# Altium PCB relay.PcbDoc (part 4 of 4)
Units mil, origin at the board's own origin, x right, y up, seen from the top; angles counter-clockwise.
Board outline 5718.69 x 3947.04 mil, 2 copper layers (Top Layer, Bottom Layer); 122 components, 108 nets, 435 pads, 81 vias.
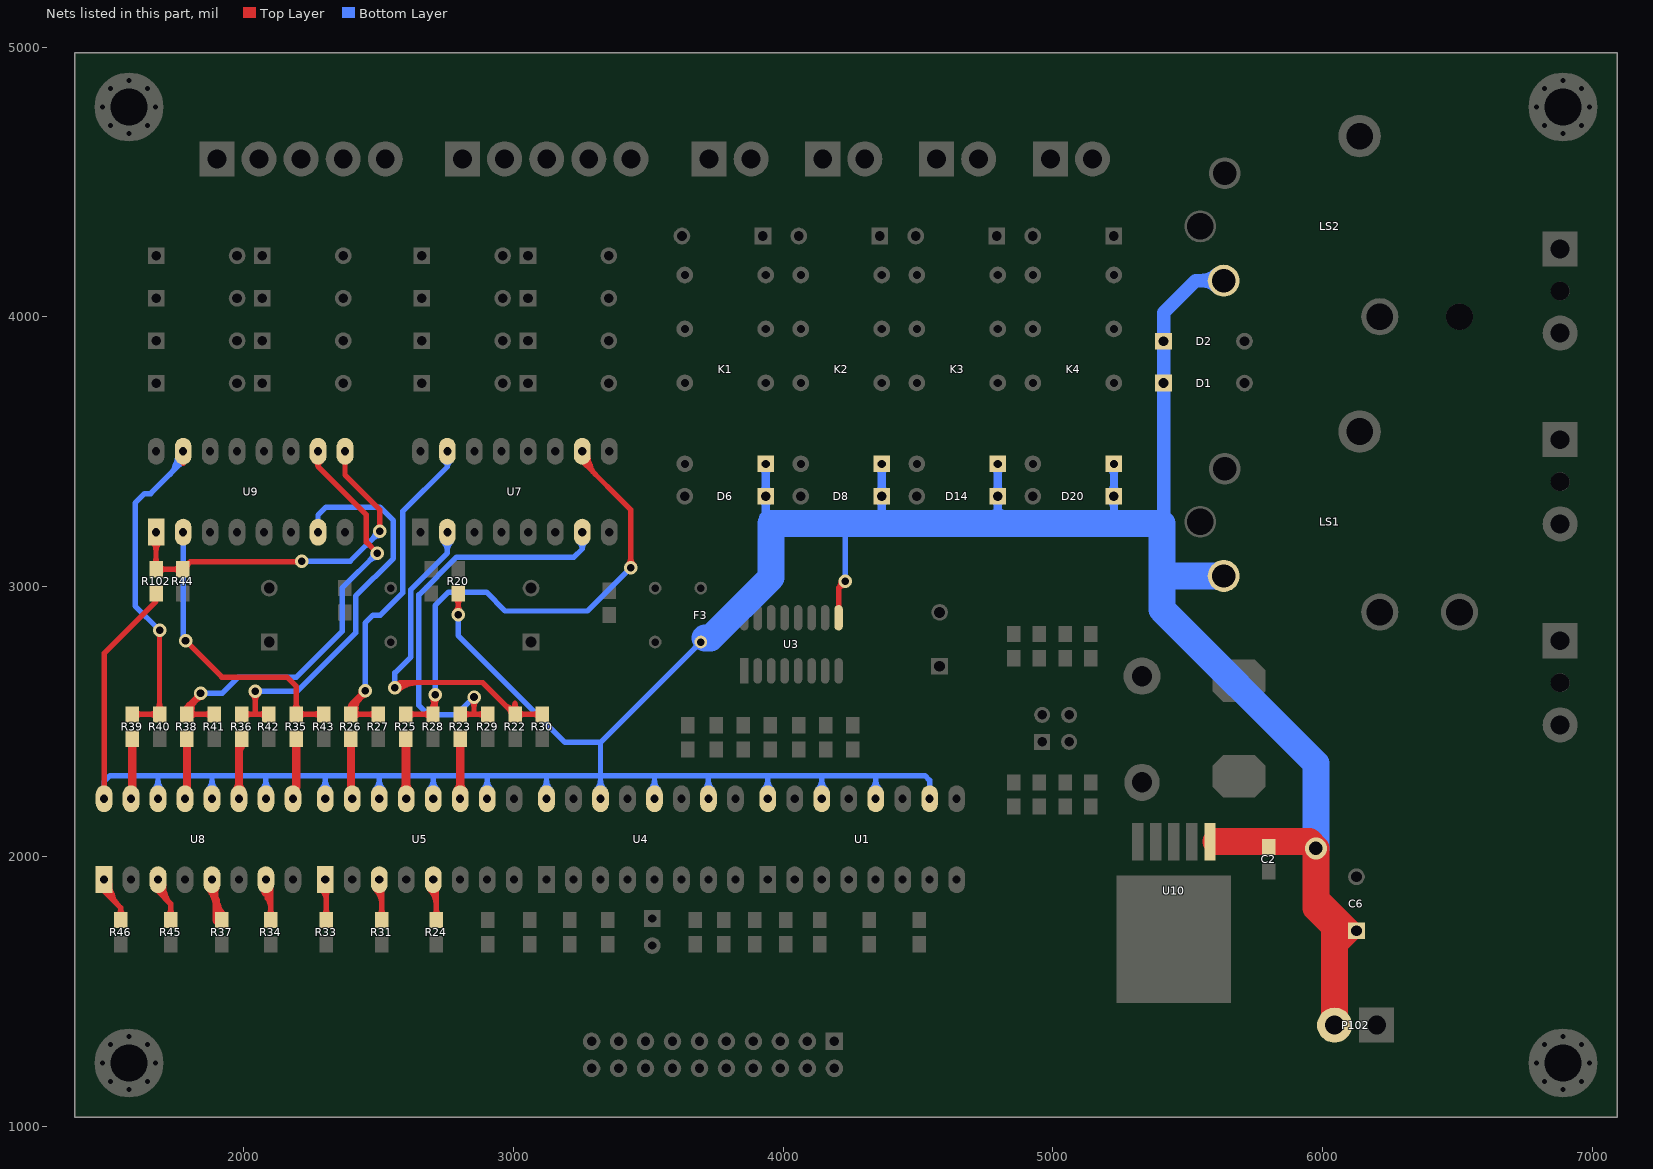
[diagram p4: the nets of this part, all layers, seen from the top]

## Via types
v1: diameter 50, hole 28, Top Layer to Bottom Layer, 42 vias
v2: diameter 50, hole 30, Top Layer to Bottom Layer, 36 vias
v3: diameter 80, hole 50, Top Layer to Bottom Layer, 2 vias
v4: diameter 100, hole 60, Top Layer to Bottom Layer, 1 vias

## Nets (pads, with @x,y where several pads share a name; then routed paths per layer and width w, separated by ;. In a path a pad name is that pad's centre, name@x,y a point inside that pad or via, vN(x,y) a via of type N, cw(c..) or ccw(c..) an arc to the next point about the centre after c; other vN are vias at no path point) (continued)
NetR22_2: R22.2 R30.2 U7.2 | length 2176.5
  Top Layer w20: v1@2557.09,2628.54 cw(c2596.84,2588.79) 2596.84,2645 ; v1(2560.63,2625) 2580.63,2645 ; v1@2563.46,2639.73 ccw(c2567.08,2658.55) 2580.63,2645 ; v1@2571.24,2614.39 cw(c2645.13,2540.5) 2645.13,2645 ; v1@2575.36,2627.83 cw(c2594.18,2631.45) 2580.63,2645 ; 2969.11,2562.31 ccw(c3006.35,2599.55) R22.2@3006.35,2546.89 ; R22.2@2985.56,2545.87 cw(c2971.58,2531.89) R22.2@2991.35,2531.89 ; R30.2@3107.7,2526.89 R22.2@3006.35,2526.89 3004.54,2526.89 2886.43,2645 2580.63,2645 ; 3006.35,2568.1 ccw(c3042.56,2568.1) 3016.96,2542.5 cw(c3042.56,2568.1) 3006.35,2568.1 ; 3006.35,2568.1 cw(c2970.14,2568.1) 2995.74,2542.5 ccw(c2970.14,2568.1) 3006.35,2568.1 ; R22.2@3016.96,2516.28 cw(c3042.56,2490.68) 3042.56,2526.89 ; R22.2@3016.96,2516.28 cw(c3042.56,2490.68) 3042.56,2526.89 ; R22.2@3016.96,2516.28 cw(c3042.56,2490.68) 3042.56,2526.89 ; R22.2@3016.96,2537.5 ccw(c3042.56,2563.1) 3042.56,2526.89 ; R22.2@3016.96,2537.5 ccw(c3042.56,2563.1) 3042.56,2526.89 ; R22.2@3016.96,2537.5 ccw(c3042.56,2563.1) 3042.56,2526.89 ; 3071.49,2526.89 ccw(c3071.49,2563.1) R30.2@3097.1,2537.5 ; 3071.49,2526.89 cw(c3071.49,2490.68) R30.2@3097.1,2516.28 ; 3071.49,2526.89 ccw(c3071.49,2563.1) R30.2@3097.1,2537.5 ; 3071.49,2526.89 cw(c3071.49,2490.68) R30.2@3097.1,2516.28 ; 3071.49,2526.89 ccw(c3071.49,2563.1) R30.2@3097.1,2537.5 ; 3071.49,2526.89 cw(c3071.49,2490.68) R30.2@3097.1,2516.28
  Bottom Layer w20: v1(2560.63,2625) 2560.63,2680.63 2620,2740 2620,2989.53 2755.47,3125 U7.2@2755.47,3202.09 ; U7.2@2740.62,3168.24 cw(c2704.77,3132.39) 2755.47,3132.39 ; U7.2@2740.62,3168.24 cw(c2704.77,3132.39) 2755.47,3132.39 ; U7.2@2740.62,3168.24 cw(c2704.77,3132.39) 2755.47,3132.39 ; 2755.47,3132.39 cw(c2806.17,3132.39) U7.2@2770.32,3168.24 ; 2755.47,3132.39 cw(c2806.17,3132.39) U7.2@2770.32,3168.24 ; 2755.47,3132.39 cw(c2806.17,3132.39) U7.2@2770.32,3168.24
NetR23_1: R23.1 U5.11 | length 891.9
  Top Layer w30: U5.11@2803.07,2214.29 2803.07,2396.32 ; R23.1@2803.07,2436.32 R23.1@2803.64,2436.89 U5.11@2803.64,2214.86 ; U5.11@2791.76,2244.61 ccw(c2764.44,2271.92) 2803.07,2271.92 ; U5.11@2791.76,2244.6 ccw(c2763.06,2273.3) 2803.64,2273.3 ; U5.11@2791.76,2244.61 ccw(c2764.44,2271.92) 2803.07,2271.92 ; U5.11@2791.76,2244.6 ccw(c2763.06,2273.3) 2803.64,2273.3 ; U5.11@2791.76,2244.61 ccw(c2764.44,2271.92) 2803.07,2271.92 ; U5.11@2791.76,2244.6 ccw(c2763.06,2273.3) 2803.64,2273.3 ; 2803.07,2271.92 ccw(c2841.7,2271.92) U5.11@2814.38,2244.61 ; 2803.07,2271.92 ccw(c2841.7,2271.92) U5.11@2814.38,2244.61 ; 2803.07,2271.92 ccw(c2841.7,2271.92) U5.11@2814.38,2244.61 ; 2803.07,2406.36 cw(c2829.17,2406.36) R23.1@2810.71,2424.82 ; 2803.07,2406.36 cw(c2829.17,2406.36) R23.1@2810.71,2424.82 ; 2803.07,2406.36 cw(c2829.17,2406.36) R23.1@2810.71,2424.82 ; 2803.07,2406.36 cw(c2829.17,2406.36) R23.1@2810.71,2424.82 ; 2803.07,2406.36 cw(c2829.17,2406.36) R23.1@2810.71,2424.82 ; 2803.07,2406.36 cw(c2829.17,2406.36) R23.1@2810.71,2424.82 ; 2803.64,2270.54 ccw(c2840.32,2270.54) U5.11@2814.38,2244.61 ; 2803.64,2270.54 ccw(c2840.32,2270.54) U5.11@2814.38,2244.61 ; 2803.64,2270.54 ccw(c2840.32,2270.54) U5.11@2814.38,2244.61
NetR23_2: R23.2 R29.2 U7.7 | length 2267.6
  Top Layer w20: R23.2@2815,2538.24 R23.2@2803.64,2526.89 2854.32,2526.89 ; v1(2854.32,2591.31) 2854.32,2526.89 ; R29.2@2905,2526.89 2854.32,2526.89 ; R23.2@2814.25,2516.28 cw(c2839.86,2490.68) 2839.86,2526.89 ; R23.2@2814.25,2516.28 cw(c2839.86,2490.68) 2839.86,2526.89 ; R23.2@2814.25,2516.28 cw(c2839.86,2490.68) 2839.86,2526.89 ; R23.2@2814.25,2537.5 ccw(c2839.86,2563.1) 2839.86,2526.89 ; R23.2@2814.25,2537.5 ccw(c2839.86,2563.1) 2839.86,2526.89 ; R23.2@2814.25,2537.5 ccw(c2839.86,2563.1) 2839.86,2526.89 ; v1@2843.71,2580.7 cw(c2818.11,2555.1) 2854.32,2555.1 ; v1@2843.71,2580.7 cw(c2818.11,2555.1) 2854.32,2555.1 ; v1@2843.71,2580.7 cw(c2818.11,2555.1) 2854.32,2555.1 ; 2854.32,2555.1 cw(c2890.53,2555.1) v1@2864.93,2580.7 ; 2854.32,2555.1 cw(c2890.53,2555.1) v1@2864.93,2580.7 ; 2854.32,2555.1 cw(c2890.53,2555.1) v1@2864.93,2580.7 ; 2868.78,2526.89 ccw(c2868.78,2563.1) R29.2@2894.39,2537.5 ; 2868.78,2526.89 cw(c2868.78,2490.68) R29.2@2894.39,2516.28 ; 2868.78,2526.89 ccw(c2868.78,2563.1) R29.2@2894.39,2537.5 ; 2868.78,2526.89 cw(c2868.78,2490.68) R29.2@2894.39,2516.28 ; 2868.78,2526.89 ccw(c2868.78,2563.1) R29.2@2894.39,2537.5 ; 2868.78,2526.89 cw(c2868.78,2490.68) R29.2@2894.39,2516.28
  Bottom Layer w20: v1(2854.32,2591.31) 2788.01,2525 2685,2525 2650,2560 2650,2970 2790,3110 3225,3110 3255.47,3140.47 ; U7.7@3255.47,3202.09 3255.47,3140.47 ; U7.7@3242.68,3166.43 cw(c3222.74,3140.47) 3255.47,3140.47 ; U7.7@3242.68,3166.43 cw(c3222.74,3140.47) 3255.47,3140.47 ; U7.7@3242.68,3166.43 cw(c3222.74,3140.47) 3255.47,3140.47 ; 3255.47,3140.47 cw(c3288.21,3140.47) U7.7@3268.27,3166.43 ; 3255.47,3140.47 cw(c3288.21,3140.47) U7.7@3268.27,3166.43 ; 3255.47,3140.47 cw(c3288.21,3140.47) U7.7@3268.27,3166.43
NetR24_1: R24.1 U5.5 | length 662.9
  Top Layer w20: R24.1@2715,1765 2715,1883.07 2703.07,1895 U5.5@2703.07,1914.29 U5.5@2717.91,1899.46 ; U5.5@2688.22,1880.44 cw(c2623.57,1815.79) 2715,1815.79 ; U5.5@2688.22,1880.44 cw(c2623.57,1815.79) 2715,1815.79 ; U5.5@2688.22,1880.44 cw(c2623.57,1815.79) 2715,1815.79 ; U5.5@2702.36,1894.58 cw(c2671.86,1864.08) 2715,1864.08 ; U5.5@2702.36,1894.58 cw(c2671.86,1864.08) 2715,1864.08 ; U5.5@2702.36,1894.58 cw(c2671.86,1864.08) 2715,1864.08 ; R24.1@2704.39,1780.61 ccw(c2678.79,1806.21) 2715,1806.21 ; R24.1@2704.39,1780.61 ccw(c2678.79,1806.21) 2715,1806.21 ; R24.1@2704.39,1780.61 ccw(c2678.79,1806.21) 2715,1806.21 ; 2715,1806.21 ccw(c2751.21,1806.21) R24.1@2725.61,1780.61 ; 2715,1806.21 ccw(c2751.21,1806.21) R24.1@2725.61,1780.61 ; 2715,1806.21 ccw(c2751.21,1806.21) R24.1@2725.61,1780.61
NetR25_1: R25.1 U5.13 | length 913.1
  Top Layer w30: U5.13@2600.94,2216.42 R25.1@2600.94,2436.89 ; U5.13@2603.07,2214.29 2603.07,2394.76 ; U5.13@2591.76,2244.61 ccw(c2564.44,2271.92) 2603.07,2271.92 ; U5.13@2591.76,2244.61 ccw(c2569.59,2266.77) 2600.94,2266.77 ; U5.13@2591.76,2244.61 ccw(c2564.44,2271.92) 2603.07,2271.92 ; U5.13@2591.76,2244.61 ccw(c2569.59,2266.77) 2600.94,2266.77 ; U5.13@2591.76,2244.61 ccw(c2564.44,2271.92) 2603.07,2271.92 ; U5.13@2591.76,2244.61 ccw(c2569.59,2266.77) 2600.94,2266.77 ; R25.1@2593.87,2424.82 cw(c2571.65,2402.6) 2603.07,2402.6 ; R25.1@2593.87,2424.82 cw(c2571.65,2402.6) 2603.07,2402.6 ; R25.1@2593.87,2424.82 cw(c2571.65,2402.6) 2603.07,2402.6 ; R25.1@2593.87,2424.82 cw(c2571.65,2402.6) 2603.07,2402.6 ; R25.1@2593.87,2424.82 cw(c2571.65,2402.6) 2603.07,2402.6 ; R25.1@2593.87,2424.82 cw(c2571.65,2402.6) 2603.07,2402.6 ; 2600.94,2277.07 ccw(c2646.85,2277.07) U5.13@2614.38,2244.61 ; 2600.94,2277.07 ccw(c2646.85,2277.07) U5.13@2614.38,2244.61 ; 2600.94,2277.07 ccw(c2646.85,2277.07) U5.13@2614.38,2244.61 ; 2603.07,2271.92 ccw(c2641.7,2271.92) U5.13@2614.38,2244.61 ; 2603.07,2271.92 ccw(c2641.7,2271.92) U5.13@2614.38,2244.61 ; 2603.07,2271.92 ccw(c2641.7,2271.92) U5.13@2614.38,2244.61
NetR25_2: R25.2 R28.2 U7.10 | length 3474
  Top Layer w20: R25.2@2600.94,2526.89 R28.2@2702.29,2526.89 2710,2534.6 v1(2710,2600) ; U7.10@3255.47,3502.09 3255.47,3465.16 3435.63,3285 v1(3435.63,3070.63) ; R25.2@2611.54,2516.28 cw(c2637.15,2490.68) 2637.15,2526.89 ; R25.2@2611.54,2516.28 cw(c2637.15,2490.68) 2637.15,2526.89 ; R25.2@2611.54,2516.28 cw(c2637.15,2490.68) 2637.15,2526.89 ; R25.2@2611.54,2537.5 ccw(c2637.15,2563.1) 2637.15,2526.89 ; R25.2@2611.54,2537.5 ccw(c2637.15,2563.1) 2637.15,2526.89 ; R25.2@2611.54,2537.5 ccw(c2637.15,2563.1) 2637.15,2526.89 ; 2666.08,2526.89 ccw(c2666.08,2563.1) R28.2@2691.68,2537.5 ; 2666.08,2526.89 cw(c2666.08,2490.68) R28.2@2691.68,2516.28 ; 2666.08,2526.89 ccw(c2666.08,2563.1) R28.2@2691.68,2537.5 ; 2666.08,2526.89 cw(c2666.08,2490.68) R28.2@2691.68,2516.28 ; 2666.08,2526.89 ccw(c2666.08,2563.1) R28.2@2691.68,2537.5 ; 2666.08,2526.89 cw(c2666.08,2490.68) R28.2@2691.68,2516.28 ; R28.2@2691.68,2542.5 ccw(c2647.47,2586.71) v1@2710,2586.71 ; R28.2@2691.68,2542.5 ccw(c2647.47,2586.71) v1@2710,2586.71 ; R28.2@2691.68,2542.5 ccw(c2647.47,2586.71) v1@2710,2586.71 ; v1@2697.76,2591.33 cw(c2668.41,2570.52) 2703.16,2561.2 ; v1@2697.76,2591.33 cw(c2668.41,2570.52) 2703.16,2561.2 ; v1@2697.76,2591.33 cw(c2668.41,2570.52) 2703.16,2561.2 ; v1@2697.76,2591.33 cw(c2668.41,2570.52) 2703.16,2561.2 ; v1@2697.76,2591.33 cw(c2668.41,2570.52) 2703.16,2561.2 ; v1@2697.76,2591.33 cw(c2668.41,2570.52) 2703.16,2561.2 ; v1@2699.39,2589.39 cw(c2673.79,2563.79) 2710,2563.79 ; v1@2699.39,2589.39 cw(c2673.79,2563.79) 2710,2563.79 ; v1@2699.39,2589.39 cw(c2673.79,2563.79) 2710,2563.79 ; 2706.1,2572.15 cw(c2729.74,2565.81) v1@2717.5,2587.01 ; 2706.1,2572.15 cw(c2729.74,2565.81) v1@2717.5,2587.01 ; 2706.1,2572.15 cw(c2729.74,2565.81) v1@2717.5,2587.01 ; 2706.1,2572.15 cw(c2729.74,2565.81) v1@2717.5,2587.01 ; 2706.1,2572.15 cw(c2729.74,2565.81) v1@2717.5,2587.01 ; 2706.1,2572.15 cw(c2729.74,2565.81) v1@2717.5,2587.01 ; 2710,2563.79 cw(c2746.21,2563.79) v1@2720.61,2589.39 ; 2710,2563.79 cw(c2746.21,2563.79) v1@2720.61,2589.39 ; 2710,2563.79 cw(c2746.21,2563.79) v1@2720.61,2589.39 ; U7.10@3255.04,3482.18 cw(c3229.65,3428.55) 3286.97,3443.91 ; U7.10@3255.04,3482.18 cw(c3229.65,3428.55) 3286.97,3443.91 ; U7.10@3255.04,3482.18 cw(c3229.65,3428.55) 3286.97,3443.91 ; U7.10@3256.47,3483.09 ccw(c3302.17,3483.09) 3269.86,3450.77 ; U7.10@3256.47,3483.09 ccw(c3302.17,3483.09) 3269.86,3450.77 ; U7.10@3256.47,3483.09 ccw(c3302.17,3483.09) 3269.86,3450.77 ; U7.10@3276.47,3483.09 ccw(c3370.46,3483.09) 3304,3416.63 ; U7.10@3276.47,3483.09 ccw(c3370.46,3483.09) 3304,3416.63 ; U7.10@3276.47,3483.09 ccw(c3370.46,3483.09) 3304,3416.63 ; v1@3425.02,3081.24 ccw(c3399.42,3106.84) 3435.63,3106.84 ; v1@3425.02,3081.24 ccw(c3399.42,3106.84) 3435.63,3106.84 ; v1@3425.02,3081.24 ccw(c3399.42,3106.84) 3435.63,3106.84 ; 3435.63,3106.84 ccw(c3471.84,3106.84) v1@3446.24,3081.24 ; 3435.63,3106.84 ccw(c3471.84,3106.84) v1@3446.24,3081.24 ; 3435.63,3106.84 ccw(c3471.84,3106.84) v1@3446.24,3081.24
  Bottom Layer w20: v1(2710,2600) 2710,2930 2760,2980 2900,2980 2970,2910 3275,2910 v1(3435.63,3070.63)
NetR26_1: R26.1 U5.15 | length 395.5
  Top Layer w20: U5.15@2403.07,2214.29 2403.07,2392.05
  Top Layer w30: U5.15@2398.23,2219.13 R26.1@2398.23,2436.89
NetR26_2: R26.2 R27.2 U7.15 | length 2987.1
  Top Layer w20: v1(2450.63,2615) 2400.63,2565 ; R27.2@2499.58,2526.89 R26.2@2400.63,2526.89 ; R26.2@2389.01,2543.72 ccw(c2374.29,2562.6) 2398.23,2562.6 ; R26.2@2389.01,2543.72 ccw(c2374.29,2562.6) 2398.23,2562.6 ; R26.2@2389.01,2543.72 ccw(c2374.29,2562.6) 2398.23,2562.6 ; R26.2@2389.72,2544.24 ccw(c2375.43,2565) 2400.63,2565 ; R26.2@2389.72,2544.24 ccw(c2375.43,2565) 2400.63,2565 ; R26.2@2389.72,2544.24 ccw(c2375.43,2565) 2400.63,2565 ; R26.2@2393.23,2531.89 cw(c2455.31,2531.89) 2411.41,2575.78 ; R26.2@2393.23,2531.89 cw(c2455.31,2531.89) 2411.41,2575.78 ; R26.2@2393.23,2531.89 cw(c2455.31,2531.89) 2411.41,2575.78 ; R26.2@2398.23,2526.89 R26.2@2400.63,2526.89 ; R26.2@2398.23,2526.89 2398.23,2562.6 ; R26.2@2398.23,2526.89 R26.2@2400.63,2529.29 ; 2398.23,2562.6 ccw(c2422.17,2562.6) R26.2@2407.45,2543.72 ; 2398.23,2562.6 ccw(c2422.17,2562.6) R26.2@2407.45,2543.72 ; 2398.23,2562.6 ccw(c2422.17,2562.6) R26.2@2407.45,2543.72 ; 2398.23,2562.6 2400.63,2565 ; R26.2@2400.63,2526.89 R26.2@2400.63,2529.29 ; R26.2@2400.63,2529.29 2400.63,2565 ; 2400.63,2562.31 ccw(c2428.66,2562.31) R26.2@2408.84,2542.5 ; 2400.63,2562.31 ccw(c2428.66,2562.31) R26.2@2408.84,2542.5 ; 2400.63,2562.31 ccw(c2428.66,2562.31) R26.2@2408.84,2542.5 ; R26.2@2400.73,2527.56 ccw(c2382.03,2559.95) R26.2@2418.16,2550.27 ; R26.2@2400.73,2527.56 ccw(c2382.03,2559.95) R26.2@2418.16,2550.27 ; R26.2@2400.73,2527.56 ccw(c2382.03,2559.95) R26.2@2418.16,2550.27 ; R26.2@2408.84,2516.28 cw(c2434.45,2490.68) 2434.45,2526.89 ; R26.2@2408.84,2516.28 cw(c2434.45,2490.68) 2434.45,2526.89 ; R26.2@2408.84,2516.28 cw(c2434.45,2490.68) 2434.45,2526.89 ; R26.2@2408.84,2537.5 ccw(c2434.45,2563.1) 2434.45,2526.89 ; R26.2@2408.84,2537.5 ccw(c2434.45,2563.1) 2434.45,2526.89 ; R26.2@2408.84,2537.5 ccw(c2434.45,2563.1) 2434.45,2526.89 ; R26.2@2413.23,2531.89 cw(c2523.59,2531.89) v1@2445.56,2609.93 ; R26.2@2413.23,2531.89 cw(c2523.59,2531.89) v1@2445.56,2609.93 ; R26.2@2413.23,2531.89 cw(c2523.59,2531.89) v1@2445.56,2609.93 ; 2428.19,2585.32 ccw(c2418.36,2602.34) v1@2436.67,2609.52 ; 2428.19,2585.32 ccw(c2418.36,2602.34) v1@2436.67,2609.52 ; 2428.19,2585.32 ccw(c2418.36,2602.34) v1@2436.67,2609.52 ; 2428.19,2585.32 ccw(c2418.36,2602.34) v1@2436.67,2609.52 ; 2428.67,2580.68 cw(c2465.53,2559.41) v1@2454.51,2600.51 ; 2428.67,2580.68 cw(c2465.53,2559.41) v1@2454.51,2600.51 ; 2428.67,2580.68 cw(c2465.53,2559.41) v1@2454.51,2600.51 ; 2428.67,2580.68 cw(c2465.53,2559.41) v1@2454.51,2600.51 ; 2428.67,2580.68 cw(c2465.53,2559.41) v1@2454.51,2600.51 ; 2428.67,2580.68 cw(c2465.53,2559.41) v1@2454.51,2600.51 ; 2433.16,2588.45 ccw(c2407.29,2603.39) v1@2436.14,2611.12 ; 2433.16,2588.45 ccw(c2407.29,2603.39) v1@2436.14,2611.12 ; 2433.16,2588.45 ccw(c2407.29,2603.39) v1@2436.14,2611.12 ; 2433.16,2588.45 ccw(c2407.29,2603.39) v1@2436.14,2611.12 ; 2433.16,2588.45 ccw(c2407.29,2603.39) v1@2436.14,2611.12 ; 2433.16,2588.45 ccw(c2407.29,2603.39) v1@2436.14,2611.12 ; 2463.37,2526.89 ccw(c2463.37,2563.1) R27.2@2488.98,2537.5 ; 2463.37,2526.89 cw(c2463.37,2490.68) R27.2@2488.98,2516.28 ; 2463.37,2526.89 ccw(c2463.37,2563.1) R27.2@2488.98,2537.5 ; 2463.37,2526.89 cw(c2463.37,2490.68) R27.2@2488.98,2516.28 ; 2463.37,2526.89 ccw(c2463.37,2563.1) R27.2@2488.98,2537.5 ; 2463.37,2526.89 cw(c2463.37,2490.68) R27.2@2488.98,2516.28
  Bottom Layer w20: v1(2450.63,2615) 2450.63,2865.63 2480,2895 2507.32,2895 2590,2977.68 2590,3279.37 2755.47,3444.84 ; U7.15@2755.47,3502.09 2755.47,3444.84 ; U7.15@2744.2,3465.37 cw(c2731.15,3444.84) 2755.47,3444.84 ; U7.15@2744.2,3465.37 cw(c2731.15,3444.84) 2755.47,3444.84 ; U7.15@2744.2,3465.37 cw(c2731.15,3444.84) 2755.47,3444.84 ; 2755.47,3444.84 cw(c2779.79,3444.84) U7.15@2766.74,3465.37 ; 2755.47,3444.84 cw(c2779.79,3444.84) U7.15@2766.74,3465.37 ; 2755.47,3444.84 cw(c2779.79,3444.84) U7.15@2766.74,3465.37
NetR31_1: R31.1 U5.3 | length 516.5
  Top Layer w20: U5.3@2503.07,1914.29 2512.1,1905.26 R31.1@2512.1,1764.29 ; U5.3@2488.22,1880.44 cw(c2430.58,1822.8) 2512.1,1822.8 ; U5.3@2488.22,1880.44 cw(c2430.58,1822.8) 2512.1,1822.8 ; U5.3@2488.22,1880.44 cw(c2430.58,1822.8) 2512.1,1822.8 ; R31.1@2501.49,1779.9 ccw(c2475.89,1805.5) 2512.1,1805.5 ; R31.1@2501.49,1779.9 ccw(c2475.89,1805.5) 2512.1,1805.5 ; R31.1@2501.49,1779.9 ccw(c2475.89,1805.5) 2512.1,1805.5 ; 2512.1,1805.5 ccw(c2548.31,1805.5) R31.1@2522.71,1779.9 ; 2512.1,1805.5 ccw(c2548.31,1805.5) R31.1@2522.71,1779.9 ; 2512.1,1805.5 ccw(c2548.31,1805.5) R31.1@2522.71,1779.9
NetR33_1: R33.1 U5.1 | length 560.9
  Top Layer w20: U5.1@2303.07,1914.29 2306.29,1911.07 R33.1@2306.29,1764.29 ; U5.1@2288.22,1880.44 cw(c2244.59,1836.81) 2306.29,1836.81 ; U5.1@2288.22,1880.44 cw(c2244.59,1836.81) 2306.29,1836.81 ; U5.1@2288.22,1880.44 cw(c2244.59,1836.81) 2306.29,1836.81 ; R33.1@2295.69,1779.9 ccw(c2270.08,1805.5) 2306.29,1805.5 ; R33.1@2295.69,1779.9 ccw(c2270.08,1805.5) 2306.29,1805.5 ; R33.1@2295.69,1779.9 ccw(c2270.08,1805.5) 2306.29,1805.5 ; 2306.29,1805.5 ccw(c2342.51,1805.5) R33.1@2316.9,1779.9 ; 2306.29,1805.5 ccw(c2342.51,1805.5) R33.1@2316.9,1779.9 ; 2306.29,1805.5 ccw(c2342.51,1805.5) R33.1@2316.9,1779.9 ; 2306.29,1852.37 cw(c2345.99,1852.37) U5.1@2317.92,1880.44 ; 2306.29,1852.37 cw(c2345.99,1852.37) U5.1@2317.92,1880.44 ; 2306.29,1852.37 cw(c2345.99,1852.37) U5.1@2317.92,1880.44
NetR34_1: R34.1 U8.7 | length 1059.6
  Top Layer w20: U8.7@2083.07,1914.29 2100.49,1896.87 R34.1@2100.49,1764.29 ; U8.7@2068.22,1880.44 cw(c1990.32,1802.54) 2100.49,1802.54 ; U8.7@2068.22,1880.44 cw(c1990.32,1802.54) 2100.49,1802.54 ; U8.7@2068.22,1880.44 cw(c1990.32,1802.54) 2100.49,1802.54 ; 2078.59,1862.49 cw(c2100.86,1875.35) U8.7@2083.74,1894.55 ; 2078.59,1862.49 cw(c2100.86,1875.35) U8.7@2083.74,1894.55 ; 2078.59,1862.49 cw(c2100.86,1875.35) U8.7@2083.74,1894.55 ; U8.7@2082.36,1894.58 cw(c2038.61,1850.83) 2100.49,1850.83 ; U8.7@2082.36,1894.58 cw(c2038.61,1850.83) 2100.49,1850.83 ; U8.7@2082.36,1894.58 cw(c2038.61,1850.83) 2100.49,1850.83 ; U8.7@2084.73,1874.36 cw(c2085.85,1860.26) 2098.1,1867.33 ; U8.7@2084.73,1874.36 cw(c2085.85,1860.26) 2098.1,1867.33 ; U8.7@2084.73,1874.36 cw(c2085.85,1860.26) 2098.1,1867.33 ; R34.1@2089.88,1779.9 ccw(c2064.27,1805.5) 2100.49,1805.5 ; R34.1@2089.88,1779.9 ccw(c2064.27,1805.5) 2100.49,1805.5 ; R34.1@2089.88,1779.9 ccw(c2064.27,1805.5) 2100.49,1805.5 ; 2090.88,1841.2 cw(c2117.58,1856.62) U8.7@2097.05,1879.62 ; 2090.88,1841.2 cw(c2117.58,1856.62) U8.7@2097.05,1879.62 ; 2090.88,1841.2 cw(c2117.58,1856.62) U8.7@2097.05,1879.62 ; 2098.1,1867.33 cw(c2109.27,1873.78) U8.7@2099.3,1881.97 ; 2098.1,1867.33 cw(c2109.27,1873.78) U8.7@2099.3,1881.97 ; 2098.1,1867.33 cw(c2109.27,1873.78) U8.7@2099.3,1881.97 ; 2100.49,1805.5 ccw(c2136.7,1805.5) R34.1@2111.09,1779.9 ; 2100.49,1805.5 ccw(c2136.7,1805.5) R34.1@2111.09,1779.9 ; 2100.49,1805.5 ccw(c2136.7,1805.5) R34.1@2111.09,1779.9
NetR35_1: R35.1 U8.9 | length 182.9
  Top Layer w30: R35.1@2193.07,2434.43 R35.1@2195.53,2436.89 U8.9@2195.53,2257.46
NetR35_2: R35.2 R43.2 U9.2 | length 1603.2
  Top Layer w20: v1(1785,2800) 1920,2665 2160.63,2665 2195.53,2630.1 R35.2@2195.53,2526.89 R43.2@2296.88,2526.89 ; R35.2@2184.92,2542.5 ccw(c2159.31,2568.1) 2195.53,2568.1 ; R35.2@2184.92,2542.5 ccw(c2159.31,2568.1) 2195.53,2568.1 ; R35.2@2184.92,2542.5 ccw(c2159.31,2568.1) 2195.53,2568.1 ; 2195.53,2568.1 ccw(c2231.74,2568.1) R35.2@2206.13,2542.5 ; 2195.53,2568.1 ccw(c2231.74,2568.1) R35.2@2206.13,2542.5 ; 2195.53,2568.1 ccw(c2231.74,2568.1) R35.2@2206.13,2542.5 ; R35.2@2206.13,2516.28 cw(c2231.74,2490.68) 2231.74,2526.89 ; R35.2@2206.13,2516.28 cw(c2231.74,2490.68) 2231.74,2526.89 ; R35.2@2206.13,2516.28 cw(c2231.74,2490.68) 2231.74,2526.89 ; R35.2@2206.13,2537.5 ccw(c2231.74,2563.1) 2231.74,2526.89 ; R35.2@2206.13,2537.5 ccw(c2231.74,2563.1) 2231.74,2526.89 ; R35.2@2206.13,2537.5 ccw(c2231.74,2563.1) 2231.74,2526.89 ; 2260.67,2526.89 ccw(c2260.67,2563.1) R43.2@2286.27,2537.5 ; 2260.67,2526.89 cw(c2260.67,2490.68) R43.2@2286.27,2516.28 ; 2260.67,2526.89 ccw(c2260.67,2563.1) R43.2@2286.27,2537.5 ; 2260.67,2526.89 cw(c2260.67,2490.68) R43.2@2286.27,2516.28 ; 2260.67,2526.89 ccw(c2260.67,2563.1) R43.2@2286.27,2537.5 ; 2260.67,2526.89 cw(c2260.67,2490.68) R43.2@2286.27,2516.28
  Bottom Layer w20: U9.2@1776.18,3202.09 1776.18,2808.82 v1(1785,2800)
NetR36_1: R36.1 U8.11 | length 612.5
  Top Layer w30: U8.11@1983.07,2214.29 1983.07,2427.14 R36.1@1992.82,2436.89 ; U8.11@1971.76,2244.61 ccw(c1944.44,2271.92) 1983.07,2271.92 ; U8.11@1971.76,2244.61 ccw(c1944.44,2271.92) 1983.07,2271.92 ; U8.11@1971.76,2244.61 ccw(c1944.44,2271.92) 1983.07,2271.92 ; 1983.07,2271.92 ccw(c2021.7,2271.92) U8.11@1994.38,2244.61 ; 1983.07,2271.92 ccw(c2021.7,2271.92) U8.11@1994.38,2244.61 ; 1983.07,2271.92 ccw(c2021.7,2271.92) U8.11@1994.38,2244.61 ; 1983.07,2384.21 cw(c2040.5,2384.21) R36.1@1999.89,2424.82 ; 1983.07,2384.21 cw(c2040.5,2384.21) R36.1@1999.89,2424.82 ; 1983.07,2384.21 cw(c2040.5,2384.21) R36.1@1999.89,2424.82 ; R36.1@1985.47,2425.11 cw(c1972.22,2412.91) 1987.82,2403.9 ; R36.1@1985.47,2425.11 cw(c1972.22,2412.91) 1987.82,2403.9 ; R36.1@1985.47,2425.11 cw(c1972.22,2412.91) 1987.82,2403.9
NetR36_2: R36.2 R42.2 U9.7 | length 2013.3
  Top Layer w20: R36.2@1990.63,2529.08 R36.2@1992.82,2526.89 2043.5,2526.89 ; v1(2043.5,2612.13) 2043.5,2526.89 ; R42.2@2094.17,2526.89 2043.5,2526.89 ; R36.2@2003.43,2516.28 cw(c2029.03,2490.68) 2029.03,2526.89 ; R36.2@2003.43,2516.28 cw(c2029.03,2490.68) 2029.03,2526.89 ; R36.2@2003.43,2516.28 cw(c2029.03,2490.68) 2029.03,2526.89 ; R36.2@2003.43,2537.5 ccw(c2029.03,2563.1) 2029.03,2526.89 ; R36.2@2003.43,2537.5 ccw(c2029.03,2563.1) 2029.03,2526.89 ; R36.2@2003.43,2537.5 ccw(c2029.03,2563.1) 2029.03,2526.89 ; v1@2032.89,2601.53 cw(c2007.28,2575.92) 2043.5,2575.92 ; v1@2032.89,2601.53 cw(c2007.28,2575.92) 2043.5,2575.92 ; v1@2032.89,2601.53 cw(c2007.28,2575.92) 2043.5,2575.92 ; 2043.5,2575.92 cw(c2079.71,2575.92) v1@2054.1,2601.53 ; 2043.5,2575.92 cw(c2079.71,2575.92) v1@2054.1,2601.53 ; 2043.5,2575.92 cw(c2079.71,2575.92) v1@2054.1,2601.53 ; 2057.96,2526.89 ccw(c2057.96,2563.1) R42.2@2083.57,2537.5 ; 2057.96,2526.89 cw(c2057.96,2490.68) R42.2@2083.57,2516.28 ; 2057.96,2526.89 ccw(c2057.96,2563.1) R42.2@2083.57,2537.5 ; 2057.96,2526.89 cw(c2057.96,2490.68) R42.2@2083.57,2516.28 ; 2057.96,2526.89 ccw(c2057.96,2563.1) R42.2@2083.57,2537.5 ; 2057.96,2526.89 cw(c2057.96,2490.68) R42.2@2083.57,2516.28
  Bottom Layer w20: v1(2043.5,2612.13) 2198.5,2612.13 2415.63,2829.27 2415.63,2965 2555.63,3105 2555.63,3245 2505.63,3295 2305.63,3295 2276.18,3265.55 U9.7@2276.18,3202.09
NetR37_1: R37.1 U8.5 | length 1777.5
  Top Layer w20: U8.5@1883.07,1914.29 1894.68,1902.68 1894.68,1764.29 ; U8.5@1868.22,1880.44 cw(c1804.34,1816.56) 1894.68,1816.56 ; U8.5@1868.22,1880.44 cw(c1804.34,1816.56) 1894.68,1816.56 ; U8.5@1868.22,1880.44 cw(c1804.34,1816.56) 1894.68,1816.56 ; U8.5@1872.54,1877.12 cw(c1840.19,1821.34) 1902.51,1837.92 ; U8.5@1872.54,1877.12 cw(c1840.19,1821.34) 1902.51,1837.92 ; U8.5@1872.54,1877.12 cw(c1840.19,1821.34) 1902.51,1837.92 ; U8.5@1872.54,1877.12 cw(c1840.19,1821.34) 1902.51,1837.92 ; U8.5@1872.54,1877.12 cw(c1840.19,1821.34) 1902.51,1837.92 ; U8.5@1872.54,1877.12 cw(c1840.19,1821.34) 1902.51,1837.92 ; U8.5@1882.36,1894.58 cw(c1852.62,1864.84) 1894.68,1864.84 ; U8.5@1882.36,1894.58 cw(c1852.62,1864.84) 1894.68,1864.84 ; U8.5@1882.36,1894.58 cw(c1852.62,1864.84) 1894.68,1864.84 ; 1894.68,1770.77 ccw(c1920.77,1770.77) R37.1@1902.32,1752.32 ; 1894.68,1770.77 ccw(c1920.77,1770.77) R37.1@1902.32,1752.32 ; 1894.68,1770.77 ccw(c1920.77,1770.77) R37.1@1902.32,1752.32 ; 1894.68,1819.05 ccw(c1969.05,1819.05) R37.1@1916.46,1766.46 ; 1894.68,1819.05 ccw(c1969.05,1819.05) R37.1@1916.46,1766.46 ; 1894.68,1819.05 ccw(c1969.05,1819.05) R37.1@1916.46,1766.46 ; U8.5@1894.68,1867.34 ccw(c2017.34,1867.34) R37.1@1930.61,1780.61 ; U8.5@1894.68,1867.34 ccw(c2017.34,1867.34) R37.1@1930.61,1780.61 ; U8.5@1894.68,1867.34 ccw(c2017.34,1867.34) R37.1@1930.61,1780.61 ; 1895.82,1802.22 ccw(c1926.34,1819.83) R37.1@1921.89,1784.88 ; 1895.82,1802.22 ccw(c1926.34,1819.83) R37.1@1921.89,1784.88 ; 1895.82,1802.22 ccw(c1926.34,1819.83) R37.1@1921.89,1784.88 ; 1897.5,1856.75 cw(c1933.17,1866.24) U8.5@1901.24,1884.76 ; 1897.5,1856.75 cw(c1933.17,1866.24) U8.5@1901.24,1884.76 ; 1897.5,1856.75 cw(c1933.17,1866.24) U8.5@1901.24,1884.76 ; 1897.5,1856.75 cw(c1933.17,1866.24) U8.5@1901.24,1884.76 ; 1897.5,1856.75 cw(c1933.17,1866.24) U8.5@1901.24,1884.76 ; 1897.5,1856.75 cw(c1933.17,1866.24) U8.5@1901.24,1884.76 ; 1903.05,1828.34 cw(c1852.14,1798.96) R37.1@1906.2,1775.89 ; 1903.05,1828.34 cw(c1852.14,1798.96) R37.1@1906.2,1775.89 ; 1903.05,1828.34 cw(c1852.14,1798.96) R37.1@1906.2,1775.89 ; R37.1@1903.54,1788.85 cw(c1886.46,1778.99) R37.1@1905.51,1773.88 ; R37.1@1903.54,1788.85 cw(c1886.46,1778.99) R37.1@1905.51,1773.88 ; R37.1@1903.54,1788.85 cw(c1886.46,1778.99) R37.1@1905.51,1773.88
NetR38_1: R38.1 U8.13 | length 215.6
  Top Layer w30: U8.13@1790.11,2221.34 R38.1@1790.11,2436.89
NetR38_2: R38.2 R41.2 U9.10 | length 3179.7
  Top Layer w20: v1(1840.63,2605) R38.2@1790.63,2555 ; R41.2@1891.47,2526.89 R38.2@1790.63,2526.89 ; U9.10@2276.18,3502.09 2276.18,3445.63 ; v1(2495.63,3125) 2455.47,3165.16 2455.47,3266.34 2276.18,3445.63 ; R38.2@1785.11,2531.89 cw(c1827.59,2531.89) 1797.56,2561.93 ; R38.2@1785.11,2531.89 cw(c1827.59,2531.89) 1797.56,2561.93 ; R38.2@1785.11,2531.89 cw(c1827.59,2531.89) 1797.56,2561.93 ; R38.2@1790.11,2526.89 R38.2@1790.63,2527.41 ; R38.2@1790.11,2526.89 R38.2@1790.63,2526.89 ; R38.2@1790.11,2526.89 1790.11,2554.48 R38.2@1790.63,2555 ; R38.2@1790.63,2526.89 R38.2@1790.63,2527.41 ; R38.2@1790.63,2527.41 R38.2@1790.63,2555 ; R38.2@1792.61,2527.56 ccw(c1773.92,2559.95) R38.2@1810.04,2550.27 ; R38.2@1792.61,2527.56 ccw(c1773.92,2559.95) R38.2@1810.04,2550.27 ; R38.2@1792.61,2527.56 ccw(c1773.92,2559.95) R38.2@1810.04,2550.27 ; R38.2@1800.72,2516.28 cw(c1826.33,2490.68) 1826.33,2526.89 ; R38.2@1800.72,2516.28 cw(c1826.33,2490.68) 1826.33,2526.89 ; R38.2@1800.72,2516.28 cw(c1826.33,2490.68) 1826.33,2526.89 ; R38.2@1800.72,2537.5 ccw(c1826.33,2563.1) 1826.33,2526.89 ; R38.2@1800.72,2537.5 ccw(c1826.33,2563.1) 1826.33,2526.89 ; R38.2@1800.72,2537.5 ccw(c1826.33,2563.1) 1826.33,2526.89 ; R38.2@1805.11,2531.89 cw(c1895.88,2531.89) v1@1831.7,2596.07 ; R38.2@1805.11,2531.89 cw(c1895.88,2531.89) v1@1831.7,2596.07 ; R38.2@1805.11,2531.89 cw(c1895.88,2531.89) v1@1831.7,2596.07 ; 1815.75,2568.44 cw(c1856.77,2544.75) v1@1844.51,2590.51 ; 1815.75,2568.44 cw(c1856.77,2544.75) v1@1844.51,2590.51 ; 1815.75,2568.44 cw(c1856.77,2544.75) v1@1844.51,2590.51 ; 1815.75,2568.44 cw(c1856.77,2544.75) v1@1844.51,2590.51 ; 1815.75,2568.44 cw(c1856.77,2544.75) v1@1844.51,2590.51 ; 1815.75,2568.44 cw(c1856.77,2544.75) v1@1844.51,2590.51 ; 1816.03,2574.07 ccw(c1804.7,2593.7) v1@1826.32,2600.5 ; 1816.03,2574.07 ccw(c1804.7,2593.7) v1@1826.32,2600.5 ; 1816.03,2574.07 ccw(c1804.7,2593.7) v1@1826.32,2600.5 ; 1816.03,2574.07 ccw(c1804.7,2593.7) v1@1826.32,2600.5 ; 1823.64,2582.11 ccw(c1801.94,2594.63) v1@1826.14,2601.12 ; 1823.64,2582.11 ccw(c1801.94,2594.63) v1@1826.14,2601.12 ; 1823.64,2582.11 ccw(c1801.94,2594.63) v1@1826.14,2601.12 ; 1823.64,2582.11 ccw(c1801.94,2594.63) v1@1826.14,2601.12 ; 1823.64,2582.11 ccw(c1801.94,2594.63) v1@1826.14,2601.12 ; 1823.64,2582.11 ccw(c1801.94,2594.63) v1@1826.14,2601.12 ; 1855.25,2526.89 ccw(c1855.25,2563.1) R41.2@1880.86,2537.5 ; 1855.25,2526.89 cw(c1855.25,2490.68) R41.2@1880.86,2516.28 ; 1855.25,2526.89 ccw(c1855.25,2563.1) R41.2@1880.86,2537.5 ; 1855.25,2526.89 cw(c1855.25,2490.68) R41.2@1880.86,2516.28 ; 1855.25,2526.89 ccw(c1855.25,2563.1) R41.2@1880.86,2537.5 ; 1855.25,2526.89 cw(c1855.25,2490.68) R41.2@1880.86,2516.28 ; U9.10@2265.23,3465.17 cw(c2253.28,3445.63) 2276.18,3445.63 ; U9.10@2265.23,3465.17 cw(c2253.28,3445.63) 2276.18,3445.63 ; U9.10@2265.23,3465.17 cw(c2253.28,3445.63) 2276.18,3445.63 ; 2276.18,3445.63 cw(c2299.08,3445.63) U9.10@2287.14,3465.17 ; 2276.18,3445.63 cw(c2299.08,3445.63) U9.10@2287.14,3465.17 ; 2276.18,3445.63 cw(c2299.08,3445.63) U9.10@2287.14,3465.17
  Bottom Layer w20: v1(1840.63,2605) 1920.63,2605 1980.63,2665 2195.63,2665 2365.63,2835 2365.63,2995 v1(2495.63,3125) ; 2470.02,3099.39 ccw(c2444.42,3125) v1@2480.63,3125 ; 2470.02,3099.39 cw(c2495.63,3073.79) v1@2495.63,3110 ; 2470.02,3099.39 ccw(c2444.42,3125) v1@2480.63,3125 ; 2470.02,3099.39 cw(c2495.63,3073.79) v1@2495.63,3110 ; 2470.02,3099.39 ccw(c2444.42,3125) v1@2480.63,3125 ; 2470.02,3099.39 cw(c2495.63,3073.79) v1@2495.63,3110
NetR39_1: R39.1 U8.15 | length 218.3
  Top Layer w30: U8.15@1587.41,2218.63 R39.1@1587.41,2436.89
NetR39_2: R39.2 R40.2 U9.15 | length 2236.2
  Top Layer w20: R39.2@1587.41,2526.89 R40.2@1688.76,2526.89 v1(1688.76,2838.76) ; U9.15@1776.18,3457.05 U9.15@1776.18,3502.09 ; R39.2@1598.02,2516.28 cw(c1623.62,2490.68) 1623.62,2526.89 ; R39.2@1598.02,2516.28 cw(c1623.62,2490.68) 1623.62,2526.89 ; R39.2@1598.02,2516.28 cw(c1623.62,2490.68) 1623.62,2526.89 ; R39.2@1598.02,2537.5 ccw(c1623.62,2563.1) 1623.62,2526.89 ; R39.2@1598.02,2537.5 ccw(c1623.62,2563.1) 1623.62,2526.89 ; R39.2@1598.02,2537.5 ccw(c1623.62,2563.1) 1623.62,2526.89 ; 1652.55,2526.89 ccw(c1652.55,2563.1) R40.2@1678.16,2537.5 ; 1652.55,2526.89 cw(c1652.55,2490.68) R40.2@1678.16,2516.28 ; 1652.55,2526.89 ccw(c1652.55,2563.1) R40.2@1678.16,2537.5 ; 1652.55,2526.89 cw(c1652.55,2490.68) R40.2@1678.16,2516.28 ; 1652.55,2526.89 ccw(c1652.55,2563.1) R40.2@1678.16,2537.5 ; 1652.55,2526.89 cw(c1652.55,2490.68) R40.2@1678.16,2516.28 ; R40.2@1678.16,2542.5 ccw(c1652.55,2568.1) 1688.76,2568.1 ; R40.2@1678.16,2542.5 ccw(c1652.55,2568.1) 1688.76,2568.1 ; R40.2@1678.16,2542.5 ccw(c1652.55,2568.1) 1688.76,2568.1 ; 1688.76,2568.1 ccw(c1724.97,2568.1) R40.2@1699.37,2542.5 ; 1688.76,2568.1 ccw(c1724.97,2568.1) R40.2@1699.37,2542.5 ; 1688.76,2568.1 ccw(c1724.97,2568.1) R40.2@1699.37,2542.5
  Bottom Layer w20: v1(1688.76,2838.76) 1598.2,2929.32 1598.2,3310 1633.2,3345 1655.63,3345 1776.18,3465.55 U9.15@1776.18,3502.09 ; 1727.93,3417.3 ccw(c1662.15,3483.09) U9.15@1755.18,3483.09 ; 1727.93,3417.3 ccw(c1662.15,3483.09) U9.15@1755.18,3483.09 ; 1727.93,3417.3 ccw(c1662.15,3483.09) U9.15@1755.18,3483.09 ; 1744.75,3444.15 cw(c1801.54,3428.94) U9.15@1776.61,3482.18 ; 1744.75,3444.15 cw(c1801.54,3428.94) U9.15@1776.61,3482.18 ; 1744.75,3444.15 cw(c1801.54,3428.94) U9.15@1776.61,3482.18 ; 1762.07,3451.44 ccw(c1730.43,3483.09) U9.15@1775.18,3483.09 ; 1762.07,3451.44 ccw(c1730.43,3483.09) U9.15@1775.18,3483.09 ; 1762.07,3451.44 ccw(c1730.43,3483.09) U9.15@1775.18,3483.09
NetR44_2: R44.2 R102.2 U9.1 U9.9 | length 2439.4
  Top Layer w20: U9.1@1676.18,3202.09 1675.63,3201.54 R102.2@1675.63,3065 R44.2@1775,3065 1803.27,3093.27 ; v1(2215.63,3095) 2213.9,3093.27 1803.27,3093.27 ; U9.9@2376.18,3502.09 2376.18,3414.45 2505.63,3285 v1(2505.63,3205) ; U9.1@1661.33,3168.24 cw(c1626.81,3133.72) 1675.63,3133.72 ; U9.1@1661.33,3168.24 cw(c1626.81,3133.72) 1675.63,3133.72 ; U9.1@1661.33,3168.24 cw(c1626.81,3133.72) 1675.63,3133.72 ; R102.2@1665.02,3080.61 ccw(c1639.42,3106.21) 1675.63,3106.21 ; R102.2@1665.02,3080.61 ccw(c1639.42,3106.21) 1675.63,3106.21 ; R102.2@1665.02,3080.61 ccw(c1639.42,3106.21) 1675.63,3106.21 ; 1675.63,3106.21 ccw(c1711.84,3106.21) R102.2@1686.24,3080.61 ; 1675.63,3106.21 ccw(c1711.84,3106.21) R102.2@1686.24,3080.61 ; 1675.63,3106.21 ccw(c1711.84,3106.21) R102.2@1686.24,3080.61 ; 1675.63,3131.06 cw(c1728.21,3131.06) U9.1@1691.03,3168.24 ; 1675.63,3131.06 cw(c1728.21,3131.06) U9.1@1691.03,3168.24 ; 1675.63,3131.06 cw(c1728.21,3131.06) U9.1@1691.03,3168.24 ; R102.2@1686.24,3054.39 cw(c1711.84,3028.79) 1711.84,3065 ; R102.2@1686.24,3054.39 cw(c1711.84,3028.79) 1711.84,3065 ; R102.2@1686.24,3054.39 cw(c1711.84,3028.79) 1711.84,3065 ; R102.2@1686.24,3075.61 ccw(c1711.84,3101.21) 1711.84,3065 ; R102.2@1686.24,3075.61 ccw(c1711.84,3101.21) 1711.84,3065 ; R102.2@1686.24,3075.61 ccw(c1711.84,3101.21) 1711.84,3065 ; 1738.79,3065 ccw(c1738.79,3101.21) R44.2@1764.39,3075.61 ; 1738.79,3065 cw(c1738.79,3028.79) R44.2@1764.39,3054.39 ; 1738.79,3065 ccw(c1738.79,3101.21) R44.2@1764.39,3075.61 ; 1738.79,3065 cw(c1738.79,3028.79) R44.2@1764.39,3054.39 ; 1738.79,3065 ccw(c1738.79,3101.21) R44.2@1764.39,3075.61 ; 1738.79,3065 cw(c1738.79,3028.79) R44.2@1764.39,3054.39 ; R44.2@1777.33,3084.82 ccw(c1781.99,3114.54) 1803.27,3093.27 ; R44.2@1777.33,3084.82 ccw(c1781.99,3114.54) 1803.27,3093.27 ; R44.2@1777.33,3084.82 ccw(c1781.99,3114.54) 1803.27,3093.27 ; R44.2@1790,3070 cw(c1814.14,3070) R44.2@1797.07,3087.07 ; R44.2@1790,3070 cw(c1814.14,3070) R44.2@1797.07,3087.07 ; R44.2@1790,3070 cw(c1814.14,3070) R44.2@1797.07,3087.07
  Bottom Layer w20: v1(2215.63,3095) 2395.63,3095 v1(2505.63,3205) ; 2480.02,3179.39 ccw(c2454.42,3205) v1@2490.63,3205 ; 2480.02,3179.39 cw(c2505.63,3153.79) v1@2505.63,3190 ; 2480.02,3179.39 ccw(c2454.42,3205) v1@2490.63,3205 ; 2480.02,3179.39 cw(c2505.63,3153.79) v1@2505.63,3190 ; 2480.02,3179.39 ccw(c2454.42,3205) v1@2490.63,3205 ; 2480.02,3179.39 cw(c2505.63,3153.79) v1@2505.63,3190
NetR45_1: R45.1 U8.3 | length 911.1
  Top Layer w20: U8.3@1683.07,1914.29 1683.07,1871.93 1730,1825 ; U8.3@1685.94,1874.49 cw(c1689.17,1851.1) 1706.91,1866.68 cw(c1723.09,1880.89) U8.3@1702.83,1888.18 ; R45.1@1730,1765 1730,1825 ; U8.3@1682.52,1894.46 cw(c1642.74,1834.84) 1713.02,1848.87 ; U8.3@1682.52,1894.46 cw(c1642.74,1834.84) 1713.02,1848.87 ; U8.3@1682.52,1894.46 cw(c1642.74,1834.84) 1713.02,1848.87 ; U8.3@1684.07,1895.23 ccw(c1734.47,1891.96) 1698.76,1856.24 ; U8.3@1684.07,1895.23 ccw(c1734.47,1891.96) 1698.76,1856.24 ; U8.3@1684.07,1895.23 ccw(c1734.47,1891.96) 1698.76,1856.24 ; U8.3@1704.03,1893.93 ccw(c1793.14,1888.15) 1730,1825 ; U8.3@1704.03,1893.93 ccw(c1793.14,1888.15) 1730,1825 ; U8.3@1704.03,1893.93 ccw(c1793.14,1888.15) 1730,1825 ; R45.1@1719.39,1780.61 ccw(c1693.79,1806.21) 1730,1806.21 ; R45.1@1719.39,1780.61 ccw(c1693.79,1806.21) 1730,1806.21 ; R45.1@1719.39,1780.61 ccw(c1693.79,1806.21) 1730,1806.21 ; 1730,1806.21 ccw(c1766.21,1806.21) R45.1@1740.61,1780.61 ; 1730,1806.21 ccw(c1766.21,1806.21) R45.1@1740.61,1780.61 ; 1730,1806.21 ccw(c1766.21,1806.21) R45.1@1740.61,1780.61
NetR46_1: R46.1 U8.1 | length 900.2
  Top Layer w20: U8.1@1483.07,1914.29 1483.07,1871.93 1545,1810 R46.1@1545,1765 ; U8.1@1482.59,1894.41 cw(c1450.57,1835.34) 1515.47,1852.73 ; U8.1@1482.59,1894.41 cw(c1450.57,1835.34) 1515.47,1852.73 ; U8.1@1482.59,1894.41 cw(c1450.57,1835.34) 1515.47,1852.73 ; U8.1@1484.07,1895.29 ccw(c1542.89,1895.29) 1501.3,1853.7 ; U8.1@1484.07,1895.29 ccw(c1542.89,1895.29) 1501.3,1853.7 ; U8.1@1484.07,1895.29 ccw(c1542.89,1895.29) 1501.3,1853.7 ; U8.1@1504.07,1895.29 ccw(c1611.17,1895.29) 1535.44,1819.56 ; U8.1@1504.07,1895.29 ccw(c1611.17,1895.29) 1535.44,1819.56 ; U8.1@1504.07,1895.29 ccw(c1611.17,1895.29) 1535.44,1819.56 ; R46.1@1534.39,1780.61 ccw(c1508.79,1806.21) 1545,1806.21 ; R46.1@1534.39,1780.61 ccw(c1508.79,1806.21) 1545,1806.21 ; R46.1@1534.39,1780.61 ccw(c1508.79,1806.21) 1545,1806.21 ; 1545,1806.21 ccw(c1581.21,1806.21) R46.1@1555.61,1780.61 ; 1545,1806.21 ccw(c1581.21,1806.21) R46.1@1555.61,1780.61 ; 1545,1806.21 ccw(c1581.21,1806.21) R46.1@1555.61,1780.61
VCC_24V: C2.2 C6.1 D1.2 D2.2 D6.2 D8.2 D14.2 D20.2 F3.1 K1.1 K2.1 K3.1 K4.1 LS1.4 LS2.4 P102.2 R20.2 R102.1 U1.10 U1.12 U1.14 U1.16 U3.9 U4.10 U4.12 U4.14 U4.16 U5.10 U5.12 U5.14 U5.16 U8.10 U8.12 U8.14 U8.16 U10.1 | length 19899.8
  Top Layer w20: U8.16@1483.07,2214.29 1483.07,2753.07 1675.63,2945.63 R102.1@1675.63,2975 ; v1(2795.63,2895.63) R20.2@2795.63,2975 ; U3.9@4205.63,2885 4205.63,2995.63 ; v1(4230,3020) 4205.63,2995.63 ; v1@2785.02,2906.24 ccw(c2759.42,2931.84) 2795.63,2931.84 ; v1@2785.02,2906.24 ccw(c2759.42,2931.84) 2795.63,2931.84 ; v1@2785.02,2906.24 ccw(c2759.42,2931.84) 2795.63,2931.84 ; R20.2@2785.02,2959.39 cw(c2759.42,2933.79) 2795.63,2933.79 ; R20.2@2785.02,2959.39 cw(c2759.42,2933.79) 2795.63,2933.79 ; R20.2@2785.02,2959.39 cw(c2759.42,2933.79) 2795.63,2933.79 ; 2795.63,2931.84 ccw(c2831.84,2931.84) v1@2806.24,2906.24 ; 2795.63,2931.84 ccw(c2831.84,2931.84) v1@2806.24,2906.24 ; 2795.63,2931.84 ccw(c2831.84,2931.84) v1@2806.24,2906.24 ; 2795.63,2933.79 cw(c2831.84,2933.79) R20.2@2806.24,2959.39 ; 2795.63,2933.79 cw(c2831.84,2933.79) R20.2@2806.24,2959.39 ; 2795.63,2933.79 cw(c2831.84,2933.79) R20.2@2806.24,2959.39 ; 4205.63,2995.63 ccw(c4182.94,3018.32) v1@4215.01,3019.47 ; 4205.63,2995.63 cw(c4228.32,2972.94) v1@4229.47,3005.01 ; 4205.63,2995.63 ccw(c4182.94,3018.32) v1@4215.01,3019.47 ; 4205.63,2995.63 cw(c4228.32,2972.94) v1@4229.47,3005.01 ; 4205.63,2995.63 ccw(c4182.94,3018.32) v1@4215.01,3019.47 ; 4205.63,2995.63 cw(c4228.32,2972.94) v1@4229.47,3005.01
  Top Layer w50: U10.1@5582,2055 5605,2055 ; 5975,1875 C6.1@6125,1725 6044,1644 ; C2.2@5800,2040 cw(c5836.21,2003.79) 5836.21,2055 ccw(c5836.21,2003.79) C2.2@5800,2040 ; C2.2@5800,2040 ccw(c5763.79,2003.79) 5763.79,2055 cw(c5763.79,2003.79) C2.2@5800,2040
  Top Layer w100: 5605,2055 5950,2055 v3(5975,2030) 5975,1875 5975,1810 6044,1741 6044,1644 P102.2@6044,1375
  Bottom Layer w20: U8.16@1483.07,2214.29 1483.07,2278.07 1505,2300 3323.07,2300 ; U8.14@1683.07,2214.29 1683.07,2298.07 ; U8.12@1883.07,2214.29 1883.07,2298.07 ; U8.10@2083.07,2214.29 2083.07,2298.07 ; U5.16@2303.07,2214.29 2303.07,2296.93 ; U5.14@2503.07,2214.29 2503.07,2298.07 ; U5.12@2703.07,2214.29 2703.07,2296.93 ; v1(2795.63,2895.63) 2795.63,2819.37 3191.93,2423.07 3323.07,2423.07 ; U5.10@2903.07,2214.29 2903.07,2298.07 ; U4.16@3123.07,2214.29 3123.07,2298.07 ; U4.14@3323.07,2214.29 3323.07,2300 ; U4.12@3523.07,2214.29 3523.07,2292.56 ; F3.1@3695,2795 3323.07,2423.07 ; U4.10@3723.07,2214.29 3723.07,2292.56 ; U1.16@3943.07,2214.29 3943.07,2292.56 ; U1.14@4143.07,2214.29 4143.07,2287.44 ; v1(4230,3020) 4230,3235 ; U1.12@4343.07,2214.29 4343.07,2287.44 ; U1.10@4543.07,2214.29 4543.07,2282.56 4525.63,2300 3323.07,2300 ; U8.14@1668.22,2248.14 ccw(c1632.37,2283.99) 1683.07,2283.99 ; U8.14@1668.22,2248.14 ccw(c1632.37,2283.99) 1683.07,2283.99 ; U8.14@1668.22,2248.14 ccw(c1632.37,2283.99) 1683.07,2283.99 ; 1683.07,2283.99 ccw(c1733.77,2283.99) U8.14@1697.92,2248.14 ; 1683.07,2283.99 ccw(c1733.77,2283.99) U8.14@1697.92,2248.14 ; 1683.07,2283.99 ccw(c1733.77,2283.99) U8.14@1697.92,2248.14 ; U8.12@1868.22,2248.14 ccw(c1832.37,2283.99) 1883.07,2283.99 ; U8.12@1868.22,2248.14 ccw(c1832.37,2283.99) 1883.07,2283.99 ; U8.12@1868.22,2248.14 ccw(c1832.37,2283.99) 1883.07,2283.99 ; 1883.07,2283.99 ccw(c1933.77,2283.99) U8.12@1897.92,2248.14 ; 1883.07,2283.99 ccw(c1933.77,2283.99) U8.12@1897.92,2248.14 ; 1883.07,2283.99 ccw(c1933.77,2283.99) U8.12@1897.92,2248.14 ; U8.10@2068.22,2248.14 ccw(c2032.37,2283.99) 2083.07,2283.99 ; U8.10@2068.22,2248.14 ccw(c2032.37,2283.99) 2083.07,2283.99 ; U8.10@2068.22,2248.14 ccw(c2032.37,2283.99) 2083.07,2283.99 ; 2083.07,2283.99 ccw(c2133.77,2283.99) U8.10@2097.92,2248.14 ; 2083.07,2283.99 ccw(c2133.77,2283.99) U8.10@2097.92,2248.14 ; 2083.07,2283.99 ccw(c2133.77,2283.99) U8.10@2097.92,2248.14 ; U5.16@2288.22,2248.14 ccw(c2252.37,2283.99) 2303.07,2283.99 ; U5.16@2288.22,2248.14 ccw(c2252.37,2283.99) 2303.07,2283.99 ; U5.16@2288.22,2248.14 ccw(c2252.37,2283.99) 2303.07,2283.99 ; 2303.07,2283.99 ccw(c2353.77,2283.99) U5.16@2317.92,2248.14 ; 2303.07,2283.99 ccw(c2353.77,2283.99) U5.16@2317.92,2248.14 ; 2303.07,2283.99 ccw(c2353.77,2283.99) U5.16@2317.92,2248.14 ; U5.14@2488.22,2248.14 ccw(c2452.37,2283.99) 2503.07,2283.99 ; U5.14@2488.22,2248.14 ccw(c2452.37,2283.99) 2503.07,2283.99 ; U5.14@2488.22,2248.14 ccw(c2452.37,2283.99) 2503.07,2283.99 ; 2503.07,2283.99 ccw(c2553.77,2283.99) U5.14@2517.92,2248.14 ; 2503.07,2283.99 ccw(c2553.77,2283.99) U5.14@2517.92,2248.14 ; 2503.07,2283.99 ccw(c2553.77,2283.99) U5.14@2517.92,2248.14 ; U5.12@2688.22,2248.14 ccw(c2652.37,2283.99) 2703.07,2283.99 ; U5.12@2688.22,2248.14 ccw(c2652.37,2283.99) 2703.07,2283.99 ; U5.12@2688.22,2248.14 ccw(c2652.37,2283.99) 2703.07,2283.99 ; 2703.07,2283.99 ccw(c2753.77,2283.99) U5.12@2717.92,2248.14 ; 2703.07,2283.99 ccw(c2753.77,2283.99) U5.12@2717.92,2248.14 ; 2703.07,2283.99 ccw(c2753.77,2283.99) U5.12@2717.92,2248.14 ; U5.10@2888.22,2248.14 ccw(c2852.37,2283.99) 2903.07,2283.99 ; U5.10@2888.22,2248.14 ccw(c2852.37,2283.99) 2903.07,2283.99 ; U5.10@2888.22,2248.14 ccw(c2852.37,2283.99) 2903.07,2283.99 ; 2903.07,2283.99 ccw(c2953.77,2283.99) U5.10@2917.92,2248.14 ; 2903.07,2283.99 ccw(c2953.77,2283.99) U5.10@2917.92,2248.14 ; 2903.07,2283.99 ccw(c2953.77,2283.99) U5.10@2917.92,2248.14 ; 3123.07,2283.99 ccw(c3173.77,2283.99) 3137.92,2248.14 cw(c3173.77,2283.99) 3123.07,2283.99 ; 3123.07,2283.99 cw(c3072.37,2283.99) 3108.22,2248.14 ccw(c3072.37,2283.99) 3123.07,2283.99 ; U4.14@3308.22,2248.14 ccw(c3272.37,2283.99) 3323.07,2283.99 ; U4.14@3308.22,2248.14 ccw(c3272.37,2283.99) 3323.07,2283.99 ; U4.14@3308.22,2248.14 ccw(c3272.37,2283.99) 3323.07,2283.99 ; 3323.07,2283.99 ccw(c3373.77,2283.99) U4.14@3337.92,2248.14 ; 3323.07,2283.99 ccw(c3373.77,2283.99) U4.14@3337.92,2248.14 ; 3323.07,2283.99 ccw(c3373.77,2283.99) U4.14@3337.92,2248.14 ; 3323.07,2300 3323.07,2423.07 ; U4.12@3508.22,2248.14 ccw(c3472.37,2283.99) 3523.07,2283.99 ; U4.12@3508.22,2248.14 ccw(c3472.37,2283.99) 3523.07,2283.99 ; U4.12@3508.22,2248.14 ccw(c3472.37,2283.99) 3523.07,2283.99 ; 3523.07,2283.99 ccw(c3573.77,2283.99) U4.12@3537.92,2248.14 ; 3523.07,2283.99 ccw(c3573.77,2283.99) U4.12@3537.92,2248.14 ; 3523.07,2283.99 ccw(c3573.77,2283.99) U4.12@3537.92,2248.14 ; 3671.75,2771.75 ccw(c3648.49,2795) F3.1@3681.38,2795 ; 3671.75,2771.75 cw(c3695,2748.49) F3.1@3695,2781.38 ; 3671.75,2771.75 ccw(c3648.49,2795) F3.1@3681.38,2795 ; 3671.75,2771.75 cw(c3695,2748.49) F3.1@3695,2781.38 ; 3671.75,2771.75 ccw(c3648.49,2795) F3.1@3681.38,2795 ; 3671.75,2771.75 cw(c3695,2748.49) F3.1@3695,2781.38 ; U4.10@3708.22,2248.14 ccw(c3672.37,2283.99) 3723.07,2283.99 ; U4.10@3708.22,2248.14 ccw(c3672.37,2283.99) 3723.07,2283.99 ; U4.10@3708.22,2248.14 ccw(c3672.37,2283.99) 3723.07,2283.99 ; 3723.07,2283.99 ccw(c3773.77,2283.99) U4.10@3737.92,2248.14 ; 3723.07,2283.99 ccw(c3773.77,2283.99) U4.10@3737.92,2248.14 ; 3723.07,2283.99 ccw(c3773.77,2283.99) U4.10@3737.92,2248.14 ; U1.16@3928.22,2248.14 ccw(c3892.37,2283.99) 3943.07,2283.99 ; U1.16@3928.22,2248.14 ccw(c3892.37,2283.99) 3943.07,2283.99 ; U1.16@3928.22,2248.14 ccw(c3892.37,2283.99) 3943.07,2283.99 ; 3943.07,2283.99 ccw(c3993.77,2283.99) U1.16@3957.92,2248.14 ; 3943.07,2283.99 ccw(c3993.77,2283.99) U1.16@3957.92,2248.14 ; 3943.07,2283.99 ccw(c3993.77,2283.99) U1.16@3957.92,2248.14 ; U1.14@4128.22,2248.14 ccw(c4092.37,2283.99) 4143.07,2283.99 ; U1.14@4128.22,2248.14 ccw(c4092.37,2283.99) 4143.07,2283.99 ; U1.14@4128.22,2248.14 ccw(c4092.37,2283.99) 4143.07,2283.99 ; 4143.07,2283.99 ccw(c4193.77,2283.99) U1.14@4157.92,2248.14 ; 4143.07,2283.99 ccw(c4193.77,2283.99) U1.14@4157.92,2248.14 ; 4143.07,2283.99 ccw(c4193.77,2283.99) U1.14@4157.92,2248.14 ; U1.12@4328.22,2248.14 ccw(c4292.37,2283.99) 4343.07,2283.99 ; U1.12@4328.22,2248.14 ccw(c4292.37,2283.99) 4343.07,2283.99 ; U1.12@4328.22,2248.14 ccw(c4292.37,2283.99) 4343.07,2283.99 ; 4343.07,2283.99 ccw(c4393.77,2283.99) U1.12@4357.92,2248.14 ; 4343.07,2283.99 ccw(c4393.77,2283.99) U1.12@4357.92,2248.14 ; 4343.07,2283.99 ccw(c4393.77,2283.99) U1.12@4357.92,2248.14
  Bottom Layer w30: D6.2@3924.32,3324.24 cw(c3897,3296.92) 3935.63,3296.92 cw(c3974.26,3296.92) D6.2@3946.94,3324.24 ; D6.2@3924.32,3346.86 ccw(c3897,3374.18) 3935.63,3374.18 ccw(c3974.26,3374.18) D6.2@3946.94,3346.86 ; K1.1@3924.32,3444.24 cw(c3897,3416.92) 3935.63,3416.92 cw(c3974.26,3416.92) K1.1@3946.94,3444.24 ; 3935.63,3255.55 D6.2@3935.63,3335.55 K1.1@3935.63,3455.55 ; D8.2@4354.32,3324.24 cw(c4327,3296.92) 4365.63,3296.92 cw(c4404.26,3296.92) D8.2@4376.94,3324.24 ; D8.2@4354.32,3346.86 ccw(c4327,3374.18) 4365.63,3374.18 ccw(c4404.26,3374.18) D8.2@4376.94,3346.86 ; K2.1@4354.32,3444.24 cw(c4327,3416.92) 4365.63,3416.92 cw(c4404.26,3416.92) K2.1@4376.94,3444.24 ; 4365.63,3235.63 D8.2@4365.63,3335.55 K2.1@4365.63,3455.55 ; D14.2@4784.32,3324.24 cw(c4757,3296.92) 4795.63,3296.92 cw(c4834.26,3296.92) D14.2@4806.94,3324.24 ; D14.2@4784.32,3346.86 ccw(c4757,3374.18) 4795.63,3374.18 ccw(c4834.26,3374.18) D14.2@4806.94,3346.86 ; K3.1@4784.32,3444.24 cw(c4757,3416.92) 4795.63,3416.92 cw(c4834.26,3416.92) K3.1@4806.94,3444.24 ; 4795.63,3239.37 D14.2@4795.63,3335.55 K3.1@4795.63,3455.55 ; D20.2@5214.32,3324.24 cw(c5187,3296.92) 5225.63,3296.92 cw(c5264.26,3296.92) D20.2@5236.94,3324.24 ; D20.2@5214.32,3346.86 ccw(c5187,3374.18) 5225.63,3374.18 ccw(c5264.26,3374.18) D20.2@5236.94,3346.86 ; K4.1@5214.32,3444.24 cw(c5187,3416.92) 5225.63,3416.92 cw(c5264.26,3416.92) K4.1@5236.94,3444.24 ; 5225.63,3249.37 D20.2@5225.63,3335.55 K4.1@5225.63,3455.55
  Bottom Layer w50: F3.1@3695,2795 3710,2810 3935.63,3035.63 3935.63,3255.55 3956.18,3235 ; 5405,3235 5410,3230 ; 5410,3135 5410,3230 ; LS2.4@5632.8,4134.76 5529.76,4134.76 5410,4015 D2.2@5410,3910 D1.2@5410,3755 5410,3230 ; 5550.58,4134.76 ccw(c5550.58,4216.98) LS2.4@5608.71,4158.84 ; 5550.58,4134.76 cw(c5550.58,4052.55) LS2.4@5608.71,4110.68 ; 5550.58,4134.76 ccw(c5550.58,4216.98) LS2.4@5608.71,4158.84 ; 5550.58,4134.76 cw(c5550.58,4052.55) LS2.4@5608.71,4110.68 ; 5550.58,4134.76 ccw(c5550.58,4216.98) LS2.4@5608.71,4158.84 ; 5550.58,4134.76 cw(c5550.58,4052.55) LS2.4@5608.71,4110.68
  Bottom Layer w100: F3.1@3710,2810 3730.84,2810 3955.63,3034.79 3955.63,3235 3956.18,3235 4230,3235 4365,3235 ; 4365.63,3235.63 4365,3235 ; 4795.63,3239.37 4800,3235 ; 5410.04,3039.96 LS1.4@5632.8,3039.96 ; v3(5975,2030) 5975,2345 5405,2915 5405,3235 4800,3235 ; 4365,3235 4800,3235
pads on no net: LS1.2 LS1.6 LS2.2 LS2.6 P2.2 P3.2 P4.2 U3.16 U4.15

## Polygon pours and split planes (outlines as drawn)
GND_24V on Bottom Layer "Bottom Layer-No Net" (solid, remove dead copper, pour order 4): 6425,1027.99 6425,2135 6225,2335 5555,3005 5555,3145 5555,3440 5540,3455 5535,3460 5060,3460 3525,3460 3505,3480 3505,4475 3505,4480 3485,4500 3475,4490 1760,4490 1650,4380 1395,4380 1378.7,4380 1378.7,2195 4670,2195 4805,2060 4805,1027.99
GND_24V on Top Layer "Bottom Layer-No Net" (solid, remove dead copper, pour order 3): 6425,1037.99 6425,2145 6225,2345 5555,3015 5555,3155 5555,3450 5540,3465 5535,3470 5060,3470 3525,3470 3505,3490 3505,4485 3505,4490 3485,4510 3475,4500 1760,4500 1650,4390 1395,4390 1378.7,4390 1378.7,2205 4670,2205 4805,2070 4805,1037.99

## Keep-outs
Keep-Out Layer:
  lines w8: 5960,2790 6344.39,2405.61 6374.39,2435.61 5990,2820 5960,2790 ; 6415,2335 6445,2365 6829.39,1980.61 6799.39,1950.61 6415,2335
  lines w10: 1378.7,1037.99 7087.36,1037.99 7087.36,4975 1378.7,4975 1378.7,1037.99 ; 5865,2955 5865,3675 5905,3675 5905,2955 5865,2955 ; 5875,4000 5915,4000 5915,4720 5875,4720 5875,4000

## Other copper
Top Layer:
  text "IO_RELAY" at 1985,1250 h78.74
  text "VER1.1" at 2040,1140 h78.74

## Silkscreen, mask and mechanical layers (free items; w line width, h text height)
Top Overlay:
  circle w20: c4760,1915 r10
  circle w20: c4760,1825 r10
  circle w20: c4880,1825 r10
  circle w20: c4880,1915 r10
  circle w20: c4880,1645 r10
  circle w20: c4880,1555 r10
  circle w20: c4760,1555 r10
  circle w20: c4760,1645 r10
  circle w20: c4880,1350 r10
  circle w20: c4880,1260 r10
  circle w20: c4760,1260 r10
  circle w20: c4760,1350 r10
  lines w10: 4720,1225 4720,1385 4920,1385 4920,1225 4720,1225 ; 4720,1520 4720,1680 4920,1680 4920,1520 4720,1520 ; 4720,1790 4920,1790 4920,1950 4720,1950 4720,1790
  lines w20: 4760,1555 4760,1645 ; 4760,1825 4760,1915 ; 4880,1825 4880,1915
  text "-" at 3645,4820 h78.74
  text "+" at 3905,4820 h78.74
  text "-" at 4075,4820 h78.74
  text "+" at 4325,4820 h78.74
  text "-" at 4500,4820 h78.74
  text "+" at 4745,4820 h78.74
  text "-" at 4905,4820 h78.74
  text "+" at 5170,4820 h78.74
  text "N" at 6925,4402 h60 r90
  text "L" at 6925,3745 h60 r90
  text "N" at 6775,3690 h60 r90
  text "L" at 6775,3035 h60 r90
  text "N" at 6915,2950 h60 r90
  text "L" at 6915,2265 h60 r90
  text "5V" at 4955,1830 h60
  text "12V" at 4945,1565 h60
  text "+" at 5890,1270 h78.74 r180
  text "24V" at 4955,1265 h60
  text "-" at 6400,1255 h78.74 r180

## Text inside footprints (layer, text, board x,y; h text height)
P5: Top Overlay "3" at 5120,2405 h50; Top Overlay "4" at 5120,2505 h50; Top Overlay "2" at 4860,2505 h50; Top Overlay "1" at 4880,2405 h50